# Altium PCB utlegg.PcbDoc
Units mil, origin at the board's own origin, x right, y up, seen from the top; angles counter-clockwise.
Board outline 3225 x 2655 mil, 2 copper layers (Top Layer, Bottom Layer); 32 components, 19 nets, 81 pads, 5 vias.
Unrouted connection lines stored in the file: 2.
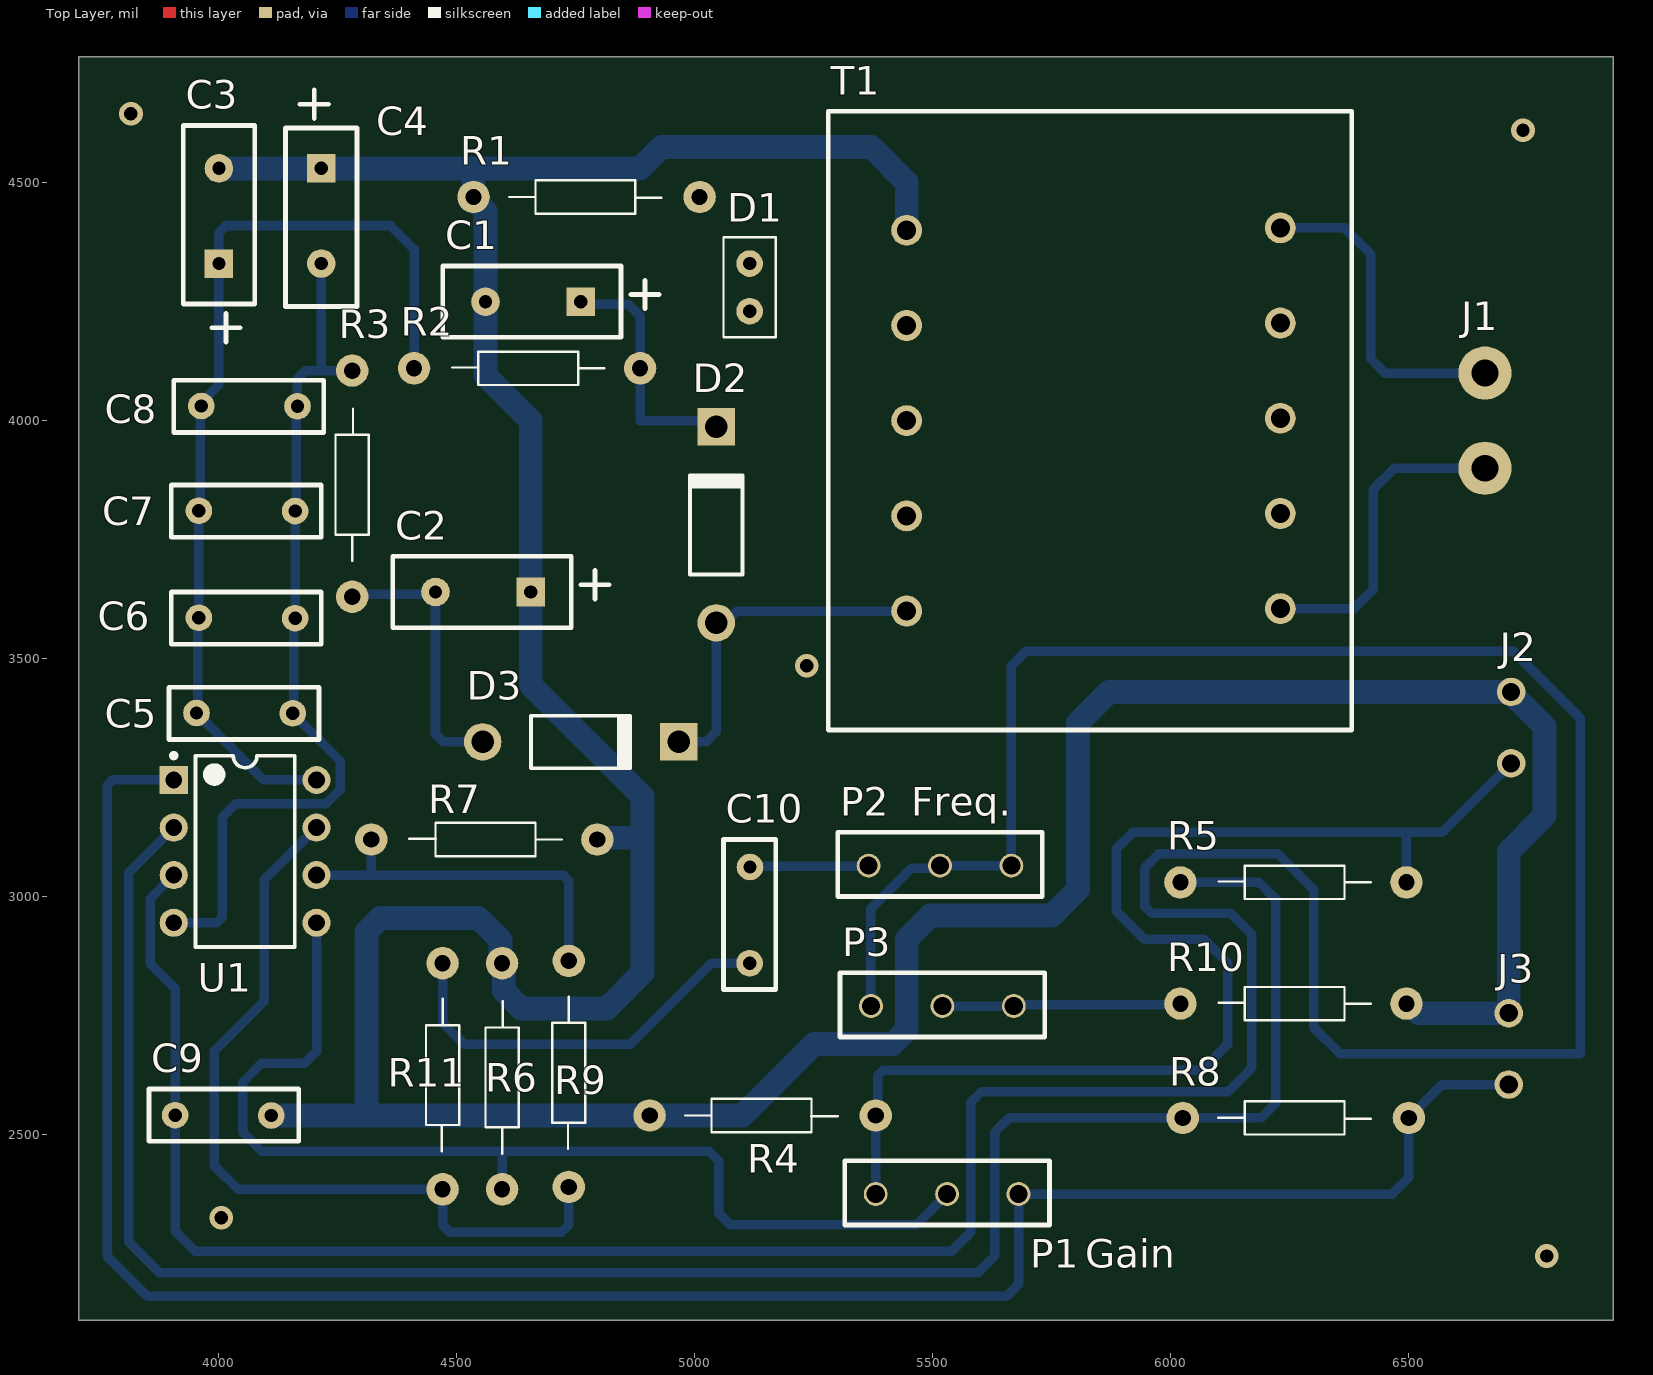
[diagram p0: Top Layer view]
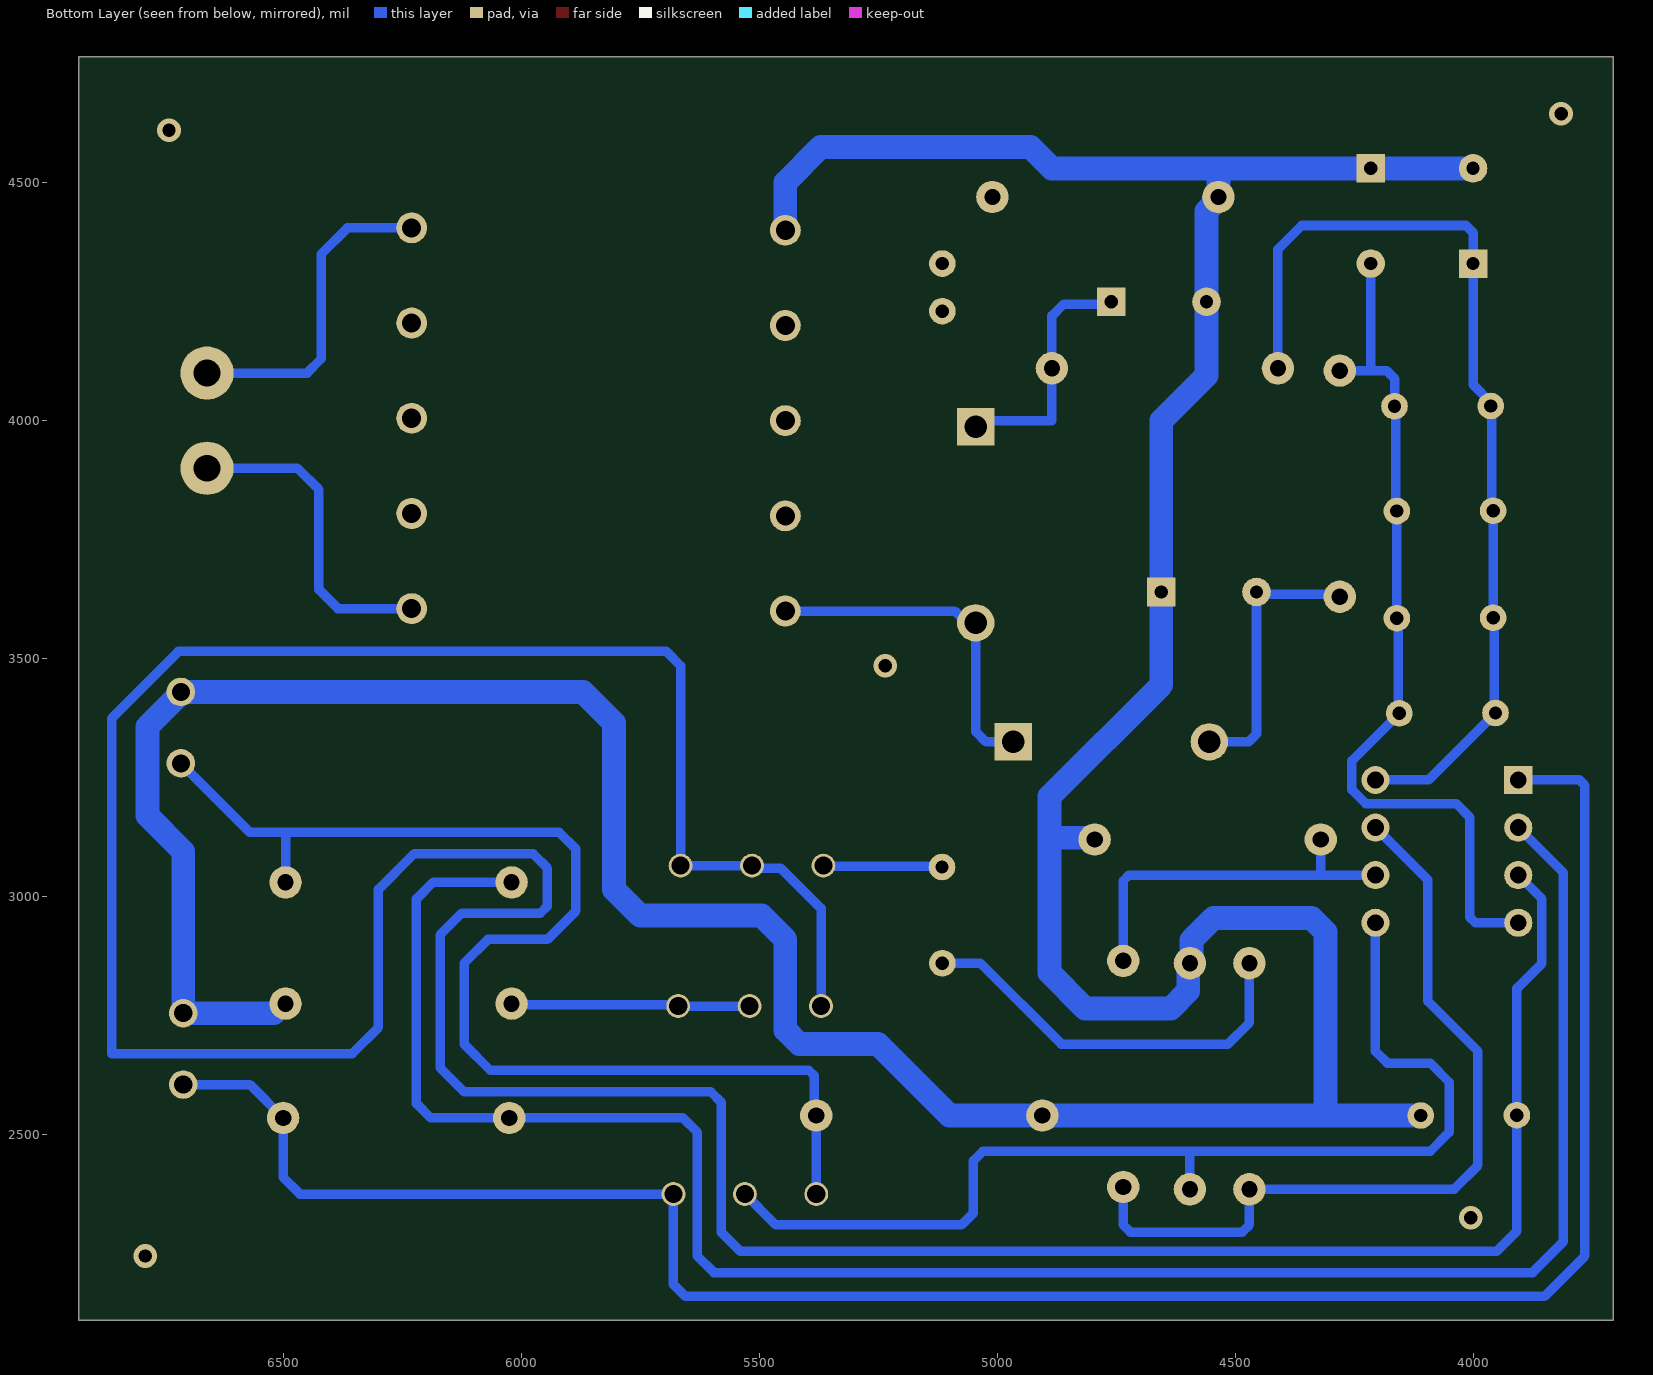
[diagram p1: Bottom Layer view, seen from below]

## Layer stack, top to bottom
Top Solder: solder mask 0.4, Solder Resist, Dk 3.5
Top Layer: signal copper 1.4
Dielectric 1: dielectric 12.6, FR-4, Dk 4.8
Bottom Layer: signal copper 1.4
Bottom Solder: solder mask 0.4, Solder Resist, Dk 3.5

## Board outline
3705,2110 3705,4765 6930,4765 6930,2110

## Design rules (kind name [scope] priority, off if disabled: settings)
Clearance [All] p1: gap=10 ignorepadtopadclearanceinfootprint=FALSE except(0: Arc-Hole Track-Hole SMDPad-Hole THPad-Hole Via-Hole Fill-Hole Poly-Hole Region-Hole Text-Hole)
PolygonConnect [All] p1: connectstyle=Relief reliefconductorwidth=10 reliefentries=4 polygonreliefangle="90 Angle" airgapwidth=10
RoutingVias [All] p1: holewidth=28 width=50 viastyle="Through Hole" minholewidth=28 minwidth=50 maxholewidth=28 maxwidth=50
SolderMaskExpansion [All] p1: expansion=4 istentingtop=FALSE
Width [All] p1: maxlimit=50 minlimit=10 preferedwidth=50 toplayer_minwidth=50 bottomlayer_prefwidth=20 minimp=50.000000 maximp=50.000000 favimp=50.000000
30 further rules are at their usual default settings.

## Classes and differential pairs
component class "Power Supply": C1 C2 C4 C5 C6 C7 C8 D1 D2 D3 R1 R2 R3
component class 4bandequi: J1 J2 J3 T1
component class "4-B EQ Ch 1": C9 C10 P1 P2 P3 R4 R5 R6 R7 R8 R9 R10 R11 U1

## Components (designator, comment, footprint, x,y, rotation, side; value= is the part's Value field where it differs from the comment)
C1 "Cap Pol1" "pol. cap." 4560,4250 r0 top value=100uF
C2 "Cap Pol1" "pol. cap." 4455,3640 r0 top value=100uF
C3 "Cap Pol1" "pol. cap." 4000,4530 r270 top value=100uF
C4 "Cap Pol1" "pol. cap." 4215,4330 r90 top value=100uF
C5 "Cap" Capacitor 32505,330 r0 top value=10nF
C6 "Cap" Capacitor 32510,530 r0 top value=10nF
C7 "Cap" Capacitor 32510,755 r0 top value=10nF
C8 "Cap" Capacitor 32515,975 r0 top value=10nF
C9 "Cap" Capacitor -24442.14,5595.72 r180 top value=47nF
C10 "Cap" Capacitor 2060,-25490 r270 top value=47nF
D1 "LED1" LED 6095,9540 r90 top
D2 "Diode 1N4001" DO-41 5045,3780.91 r90 top
D3 "Diode 1N4001" DO-41 4760,3325 r0 top
J1 "230V" "Header 2" 6660,4100 r270 top
J2 "input" "150mil header" 6715,3280 r90 top
J3 "output" "150mil header" 6710,2605 r90 top
P1 "potentiometer" "header 3" 5530,2375 r180 top value=10k
P2 "potentiometer" "header 3" 5515,3065 r180 top value=100k
P3 "potentiometer" "header 3" 5520,2770 r180 top value=100k
R1 "Resistor_Axial" resistor 4760,4475 r0 top value=330
R2 "Resistor_Axial" resistor 4660,4105 r180 top value=150
R3 "Resistor_Axial" resistor 4275,3855 r90 top value=150
R4 "Resistor_Axial" resistor 5130,2545 r0 top value=100K
R5 "Resistor_Axial" resistor 6270,3025 r180 top value=10K
R6 "Resistor_Axial" resistor 4590,2610 r90 top value=47K
R7 "Resistor_Axial" resistor 4570,3115 r180 top value=47K
R8 "Resistor_Axial" resistor 6250,2540 r0 top value=10K
R9 "Resistor_Axial" resistor 4740,2640 r270 top value=10K
R10 "Resistor_Axial" resistor 6270,2770 r180 top value=4700
R11 "Resistor_Axial" resistor 4475,2635 r270 top value=4700
T1 "250/15V" trans 6130,4560 r180 top
U1 "NE5532P" opamp 4075,3080 r0 top

## Footprints (in the part's own frame and the unit in brackets; to place one, negate y for a bottom-side part, rotate by r counter-clockwise, add the part's x,y. Pads: shape width x height; smd on the part's side, far side on the other; paste and mask are expansions set on the pad)
"150mil header" [mil]
  round 60 hole 38: 1(0,0) 2(150,0)
Capacitor [mil]
  round 56 hole 28: 1(-28552.14,3055.72) 2(-28350,3055)
  silkscreen extent -28610,3000 -28295,3110
DO-41 [mm] "Diode, Axial; Body 5.2 x 2.7 mm (LxDia. max), Lead Dia. 0.86 mm (max)"
  round 2 hole 1.2: 1(-5.23,0)
  rect 2x2 hole 1.2: 2(5.23,0)
  silkscreen extent -2.65,-1.4 2.75,1.4
"Header 2" [mil]
  round 112 hole 56: 1(0,0) 2(200,0)
"header 3" [mil]
  round 50 hole 38: 1(-150,0) 2(0,0) 3(150,0)
  silkscreen extent -215,-70 215,65
LED [mil]
  round 56 hole 28: 1(-5310,980) 2(-5210,980)
  silkscreen extent -5365,925 -5155,1035
opamp [mm]
  rect 1.5x1.5 hole 0.9: 1(-4.318,4.191)
  round 1.5 hole 0.9: 2(-4.318,1.651) 3(-4.318,-0.889) 4(-4.318,-3.429) 5(3.302,-3.429) 6(3.302,-0.889) 7(3.302,1.651) 8(3.302,4.191)
  silkscreen extent -4.44,-4.72 2.14,5.62, body extent -4.45,-4.69 3.44,5.46, height 5.08
"pol. cap." [mil]
  rect 60x60 hole 28: 1(200,0)
  round 60 hole 28: 2(0,0)
  silkscreen extent -90,-75 365,75
resistor [mil]
  round 68 hole 34: 1(-225,-5) 2(250,-5)
  silkscreen extent -150,-40 170,30
trans [mil]
  round 65 hole 40: 1(-100,155) 2(-100,955) 3(685,960) 4(685,160) 5(-100,355) 6(-100,555) 7(685,760) 8(685,560) 9(685,360) 10(-100,755)
  silkscreen extent -250,-90 850,1210

## Part data
C1 C2 C3 C4: "Polarized Capacitor (Radial)", LatestRevisionDate=17-Jul-2002, LatestRevisionNote="Re-released for DXP Platform.", PackageDescription="Polarized Capacitor (Radial); 2 Leads", PackageReference=RB7.6-15, Published=8-Jun-2000, Publisher="Altium Limited"
C5 C6 C7 C8 C9 C10: "Capacitor", LatestRevisionDate=17-Jul-2002, LatestRevisionNote="Re-released for DXP Platform.", PackageDescription="Radial Cap, Thru-Hole; 2 Leads; 0.3 in Pin Spacing", PackageReference=RAD-0.3, Published=8-Jun-2000, Publisher="Altium Limited"
D1: "Typical RED GaAs LED", LatestRevisionDate=08-Jul-2005, LatestRevisionNote="Mech Layer 1 removed.", PackageDescription="LED; 2 Leads", PackageReference=LED-1, Published=8-Jun-2000, Publisher="Altium Limited"
D2 D3: "1 Amp General Purpose Rectifier", Code_JEDEC=DO-204-AL, ComponentLink1Description="Manufacturer Link", ComponentLink1URL=http://www.fairchildsemi.com/, ComponentLink2Description=Datasheet, ComponentLink2URL=http://www.fairchildsemi.com/ds/1N%2F1N4001.pdf, DatasheetVersion=1998, LatestRevisionDate=17-Jul-2002, LatestRevisionNote="Re-released for DXP Platform.", PackageDescription="Diode, Axial; Body 5.2 x 2.7 mm (LxDia. max), Lead Dia. 0.86 mm (max)", PackageReference=DO-41, PackageVersion=Aug-1999, Published=8-Jun-2000, Publisher="Altium Limited"
J1 J2 J3: library part Header_2
R1 R2 R3 R4 R5 R6 R7 R8 R9 R10 R11: "resistor"
T1: library part "Trans Eq", "Transformer (Equivalent Circuit Model)", LatestRevisionDate=17-Jul-2002, LatestRevisionNote="Re-released for DXP Platform.", PackageDescription="Transformer; 4 Leads", PackageReference=TRF_4, Published=8-Jun-2000, Publisher="Altium Limited"
U1: library part CMP-0017-00910-2, "Dual Low-Noise High-Speed Audio Operational Amplifier, 10 to 30 V, 0 to 70 degC, 8-pin DIP (P8), Pb-Free (RoHS)", Manufacturer="Texas Instruments", Total Supply Voltage(Max)(+5V is 5, +/-5V is 10)=30, Total Supply Voltage(Min)(+5V is 5, +/-5V is 10)=10, CMRR(Min)(dB)=70, Code_JEDEC=MS-001, ComponentLink1Description="Manufacturer URL", ComponentLink1URL=http://www.ti.com/, ComponentLink2Description=Datasheet, ComponentLink2URL=http://www.ti.com/lit/ds/symlink/ne5532.pdf, ComponentLink3Description="Package Specification", ComponentLink3URL=http://www.ti.com/litv/pdf/mpdi001b, DatasheetVersion=SLOS075I, Eco-Plan="Pb-Free (RoHS)", GBW(Typ)(MHz)=10, IIB(Max)(pA)=800000, Iq per channel(Max)(mA)=4, Mounting Technology="Through Hole", Number of Channels=2, PackageDescription="8-Pin Plastic In-Line, Body 9.59 x 6.35 mm, Pitch 2.54 mm", PackageReference=P0008A, PackageVersion="4040082/E, 04/2010", PartNumber=NE5532P, Slew Rate(Typ)(V/us)=9, Sub Family="General Purpose Amplifier, High Supply Voltage Amplifier (>=30V), Low Noise Amp (<=10nV/rtHz)", Vio (25C)(Max)(mV)=4, Vn at 1kHz(Typ)(nV/rtHz)=5
P1: position=0.5
P2 P3: position=0.99

## Via types
v1: diameter 50, hole 28, Top Layer to Bottom Layer, 5 vias

## Nets (pads, with @x,y where several pads share a name; then routed paths per layer and width w, separated by ;. In a path a pad name is that pad's centre, name@x,y a point inside that pad or via, vN(x,y) a via of type N, cw(c..) or ccw(c..) an arc to the next point about the centre after c; other vN are vias at no path point)
GND: C1.2 C2.1 C3.2 C4.1 C9.1 J2.2 J3.2 R1.1 R4.1 R6.2 R7.1 R10.1 T1.4 | length 8923.7
  Bottom Layer w50: C3.2 C4.1 4535,4530 ; C9.1 4310,2540 ; R7.1 4798.44,3123.44 4883.44,3123.44 4890,3130 ; T1.4 5445,4500.71 5370.71,4575 4930,4575 4885,4530 4535,4530 ; R10.1 6499.87,2775 6519.87,2755 J3.2@6707.29,2755 ; J3.2 6710,3095 6785.25,3170.25 6785.25,3357.04 6715,3427.29 J2.2 5870,3430 5805,3365 5805,3015 5750,2960 5495,2960 5445,2910 5445,2719.29 5415.71,2690 5250,2690 5100,2540 R4.1 4310,2540 ; 4310,2540 4310,2925.71 4339.29,2955 4545,2955 4591.56,2908.44 4591.56,2863.44 4598.44,2856.56 4598.44,2801.56 4635,2765 4815,2765 4890,2840 4890,3130 ; 4535,4530 R1.1 4535,4465.13 4560,4440.13 C1.2 4560,4095 4655,4000 C2.1 4655,3445 4890,3210 4890,3130
IN: J2.1 P1.3 R4.2 R5.1 | length 2603.7
  Bottom Layer w20: P1.3 5380,2555 5384,2559 5384,2623.28 5395.72,2635 6065,2635 6120,2690 6120,2860 6070,2910 5945,2910 5885,2970 5885,3100 5920,3135 6485,3135 6495,3135 ; R5.1 6495,3135 ; J2.1 6570,3135 6495,3135
NetC1_1: C1.1 D2.2 R2.1 | length 522.9
  Bottom Layer w10: D2.2@5031.81,4000 D2.2
  Bottom Layer w20: C1.1 4765,4245 4860,4245 4885,4220 4885,4000 D2.2@5031.81,4000
NetC2_2: C2.2 D3.1 R3.1 | length 590.5
  Bottom Layer w20: R3.1@4282.5,3627.5 R3.1 4285,3635 4450,3635 C2.2 4455,3341.72 4471.72,3325 D3.1 D3.1@4551.59,3322.5
NetC9_2: C9.2 P2.1 P2.2 P3.3 U1.3 | length 8198.1
  Bottom Layer w20: U1.3 3855.47,2995.47 3855.47,2859.53 3907.86,2807.14 C9.2 3907.86,2297.14 3950,2255 5540,2255 5580,2295 5580,2568.28 5601.72,2590 6120,2590 6170,2640 6170,2920 6125,2965 5960,2965 5945,2980 5945,3060 5975,3090 6225,3090 6300,3015 6300,2725 6355,2670 6860,2670 6860,3375 6720,3515 5695,3515 5665,3485 P2.1 P2.2 5509.26,3059.26 5454.26,3059.26 5370,2975 P3.3
NetC10_1: C10.1 P2.3 | length 250.5
  Bottom Layer w20: C10.1 5117.15,3063.57 5363.57,3063.57 P2.3
NetC10_2: C10.2 R11.1 | length 866.1
  Bottom Layer w20: R11.1 4470,2735 4515,2690 4865,2690 5035,2860 C10.2 C10.2@5120,2855
NetD1_1: D1.1 D2.1 D3.2 T1.3 | length 726.7
  Bottom Layer w10: D2.1 D2.1@5063.6,3575
  Bottom Layer w20: D3.2 5023.28,3325 5045,3346.72 D2.1 ; D2.1@5063.6,3575 5088.6,3600 5195,3600 T1.3
NetD1_2: D1.2 R1.2 | length 3.5
  Bottom Layer w20: R1.2 R1.2@5012.5,4472.5
NetJ1_1: J1.1 T1.1 | length 685.2
  Bottom Layer w20: T1.1 6365,4405 6420,4350 6420,4130 6450,4100 J1.1
NetJ1_2: J1.2 T1.2 | length 675.2
  Bottom Layer w20: T1.2 6385,3605 6425,3645 6425,3855 6470,3900 J1.2
NetP1_2: P1.2 R6.1 U1.5 | length 2289.1
  Bottom Layer w20: U1.5 4205,2675 4180,2650 4090,2650 4050,2610 4050,2505 4090,2465 4595,2465 ; R6.1 4595,2465 ; P1.2 5465,2310 5075,2310 5050,2335 5050,2445 5030,2465 4595,2465
NetP3_1: P3.1 P3.2 R10.2 | length 502.1
  Bottom Layer w20: P3.2 P3.1 5672.5,2772.5 6017.5,2772.5 R10.2
NetR5_2: R5.2 R8.1 U1.2 | length 4290.1
  Bottom Layer w20: U1.2 3810,3050 3810,2275 3875,2210 5595,2210 5630,2245 5630,2505 5660,2535 R8.1 6190,2535 6220,2565 6220,2995 6185,3030 R5.2
NetR7_2: R7.2 R9.1 U1.6 | length 778.1
  Bottom Layer w20: U1.6 4320,3045 ; R7.2 4320,3045 ; R9.1 4735,3033.28 4723.28,3045 4320,3045
NetR9_2: R9.2 R11.2 U1.7 | length 1735.7
  Bottom Layer w20: U1.7 4095,3035 4095,2780 3990,2675 3990,2435 4040,2385 R11.2 4470,2310 4485,2295 4720,2295 4735,2310 R9.2 R9.2@4732.5,2387.5
OUT: J3.1 P1.1 R8.2 U1.1 | length 4482.2
  Bottom Layer w20: U1.1 3776.72,3245 3765,3233.28 3765,2245 3850,2160 5655,2160 5680,2185 P1.1 6465,2375 6500,2410 R8.2 6570,2605 J3.1
Vneg: C4.2 C5.2 C6.2 C7.2 C8.2 R3.2 U1.4 | length 1844.4
  Bottom Layer w20: U1.4 3995,2945 4007.09,2957.09 4007.09,3167.09 4035,3195 4225.04,3195 4254.53,3224.49 4254.53,3285.47 C5.2 4157.5,3387.5 4157.5,3582.5 C6.2 C7.2 4162.5,3812.5 4162.5,4027.5 C8.2 4165,4088.28 4181.72,4105 4215,4105 ; C4.2 4215,4105 ; R3.2 4215,4105
Vpos: C3.1 C5.1 C6.1 C7.1 C8.1 R2.2 U1.8 | length 2026.2
  Bottom Layer w20: U1.8 4093.58,3245 C5.1 3955.36,3388.22 3955.36,3583.22 C6.1 C7.1 3960.36,3813.22 3960.36,4028.22 C8.1 3962.86,4038.47 4000,4075.61 C3.1 4000,4395 4015,4410 4360,4410 4410,4360 R2.2
pads on no net: T1.5 T1.6 T1.7 T1.8 T1.9 T1.10
copper on no net:
  other v1: 6790,2245 4005,2325 5235,3485 6740,4610 3815,4645

## Silkscreen, mask and mechanical layers (free items; w line width, h text height)
Top Overlay:
  text "Freq." at 5455,3169.99 h60
  text "Gain" at 5820,2220 h60
Mechanical 1:
  the board outline again, w10